# Altium PCB Master.PcbDoc
Units mm, origin at the board's own origin, x right, y up, seen from the top; angles counter-clockwise.
Board outline 61 x 45.7 mm, 2 copper layers (Top Layer, Bottom Layer); 57 components, 33 nets, 169 pads, 66 vias.
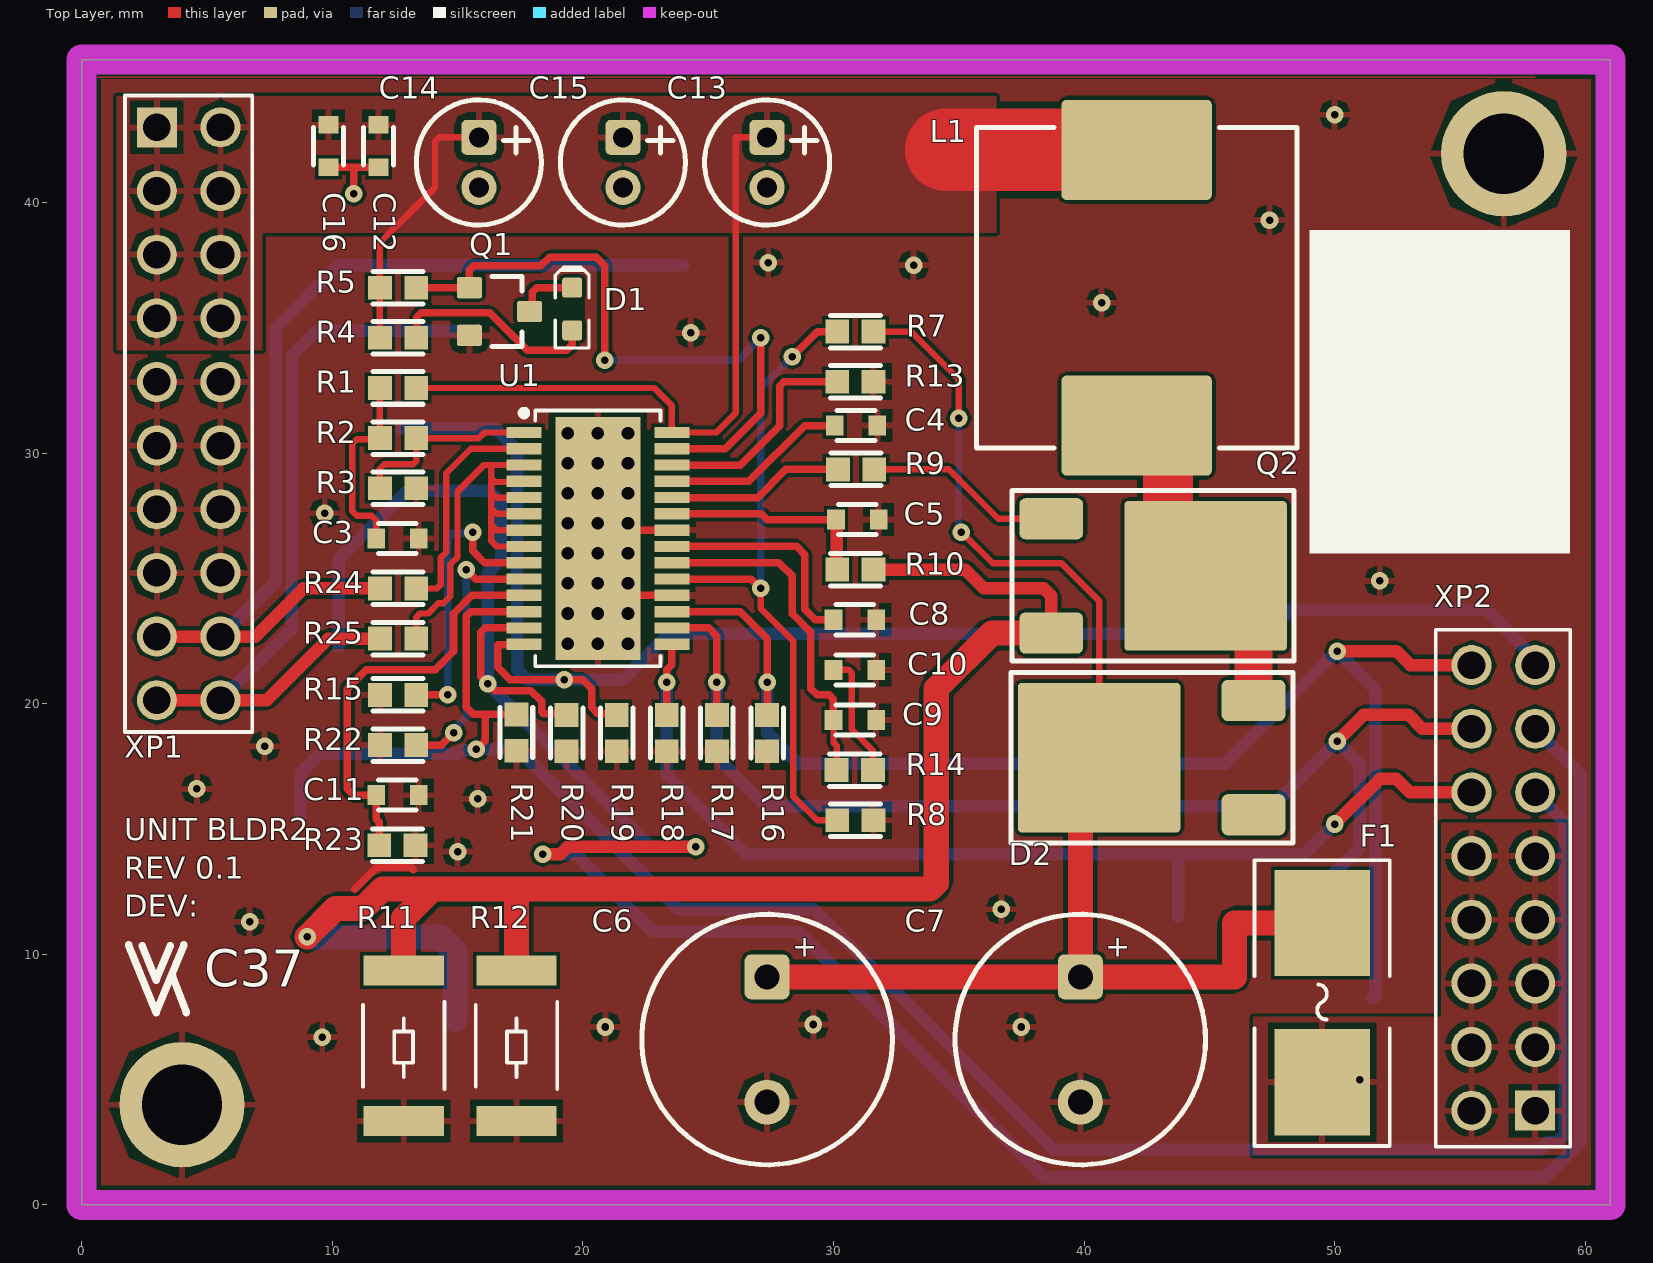
[diagram p0: Top Layer view]
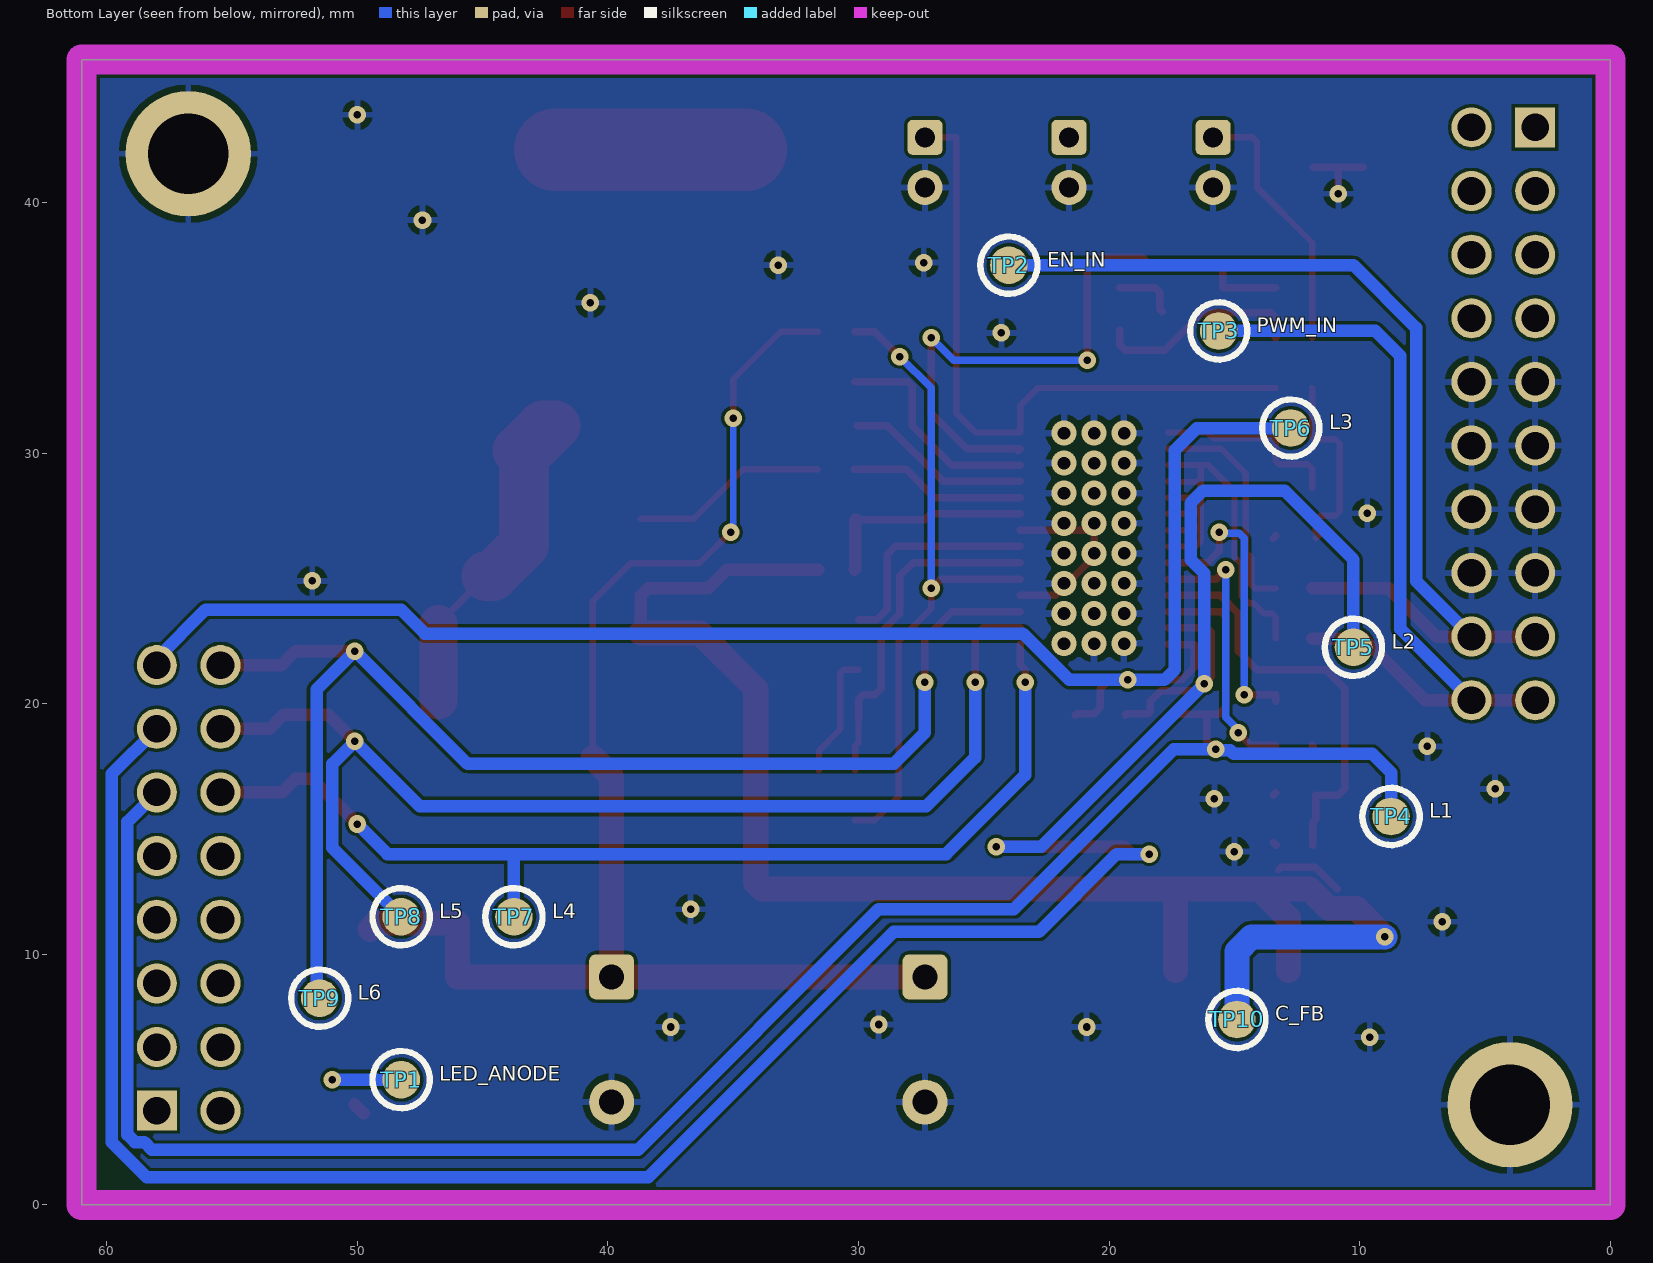
[diagram p1: Bottom Layer view, seen from below]

## Layer stack, top to bottom
Top Solder: solder mask 0.0102, Solder Resist, Dk 3.5
Top Layer: signal copper 0.0356
Dielectric 1: dielectric 0.32, FR-4, Dk 4.8
Bottom Layer: signal copper 0.0356
Bottom Solder: solder mask 0.0102, Solder Resist, Dk 3.5

## Board outline
0,0 0,45.7 61,45.7 61,0

## Design rules (kind name [scope] priority, off if disabled: settings)
Clearance [All] p1: gap=0.127 ignorepadtopadclearanceinfootprint=FALSE
PolygonConnect [All] p1: connectstyle=Relief reliefconductorwidth=0.254 reliefentries=4 polygonreliefangle="90 Angle" airgapwidth=0.254
RoutingVias [All] p1: holewidth=0.711 width=1.27 viastyle="Through Hole" minholewidth=0.711 minwidth=1.27 maxholewidth=0.711 maxwidth=1.27
SolderMaskExpansion [All] p1: expansion=0.102
Width [All] p1: maxlimit=12 minlimit=0.254 preferedwidth=0.254
30 further rules are at their usual default settings.

## Components (designator, comment, footprint, x,y, rotation, side; value= is the part's Value field where it differs from the comment)
C3 "0603-X7R-50-0.01 мкф" CAP_0603 12.6,26.6 r0 top
C4 "0603-X5R-10 1 мкф" CAP_0603 30.9,31.1 r0 top
C5 "0603-NP0-50-390 пф J" CAP_0603 30.95,27.35 r0 top
C6 "ECAP 47uF 100V 10x12.5" "CAP_ECR 10X12.5" 27.35,6.6 r270 top
C7 "ECAP 47uF 100V 10x12.5" "CAP_ECR 10X12.5" 39.85,6.6 r270 top
C8 "0603-X7R-10 2.2 мкф" CAP_0603 30.85,23.35 r0 top
C9 "0603-NP0-50-33 пф J" CAP_0603 30.85,19.35 r0 top
C10 "0603-X7R-50-0.033 мкф" CAP_0603 30.85,21.35 r0 top
C11 "0603-X7R-50-0.1 мкф" CAP_0603 12.6,16.35 r0 top
C12 "0603-X7R-10 2.2 мкф" CAP_0603 11.85,42.25 r270 top
C13 "ESX 50 в-10 мкф 5x11 Hitano" "CAP_ECR 5X11" 27.35,42.6 r270 top
C14 "ECAP (К50-35), 100мкФ, 35В, 105°C, 20%, 6.3x12мм P:2.5мм" "CAP_ECR 5X11" 15.85,42.6 r270 top
C15 "ECAP (К50-35), 100мкФ, 35В, 105°C, 20%, 6.3x12мм P:2.5мм" "CAP_ECR 5X11" 21.6,42.6 r270 top
C16 "0603-X7R-50-0.1 мкф" CAP_0603 9.85,42.25 r270 top
D1 "KPT-1608SURCK, KingBright" LED_0603_RED 19.575,35.75 r90 top value=KPT-1608SURCK
D2 "STPS5H100B" D-PAK 48.03,17.85 r90 top
F1 "2A" FUSE_LITTEL_0154 49.5,8.25 r270 top
L1 "47uH" INDUCTOR_B82477G 42.1,36.6 r270 top
Q1 "MMUN2214LT1G" SOT_23 16.675,35.65 r270 top
Q2 "FDD86102LZ" D-PAK 37.42,25.1 r270 top
R1 "0603-100к J" resistor_0603 12.625,32.6 r0 top value=100k
R2 "0603-100к J" resistor_0603 12.625,30.6 r180 top value=100k
R3 "0603-30к F" resistor_0603 12.625,28.6 r180 top value=30k
R4 "0603-7.5 к F" resistor_0603 12.625,34.6 r180 top value=7.5k
R5 "0603-30к F" resistor_0603 12.625,36.6 r180 top value=30k
R7 "0603-169 к F" resistor_0603 30.875,34.85 r0 top value=169k
R8 "0603-7.5 к F" resistor_0603 30.875,15.35 r180 top value=7.5k
R9 "0603-3 F" resistor_0603 30.9,29.35 r0 top value=3
R10 "0603-200 F" resistor_0603 30.875,25.35 r0 top value=200
R11 "2512-0.1 F" resistor_2512 12.85,6.35 r90 top value=0.1
R12 "2512-0.1 F" resistor_2512 17.35,6.35 r90 top value=0.1
R13 "0603-82 к J" resistor_0603 30.875,32.85 r0 top value=82k
R14 "0603-330 J" resistor_0603 30.85,17.35 r180 top value=330k
R15 "0603-560 к F" resistor_0603 12.625,20.35 r0 top value=560k
R16 "0603-10к J" resistor_0603 27.35,18.825 r90 top value=10k
R17 "0603-10к J" resistor_0603 25.35,18.825 r90 top value=10k
R18 "0603-10к J" resistor_0603 23.35,18.825 r90 top value=10k
R19 "0603-10к J" resistor_0603 21.35,18.825 r90 top value=10k
R20 "0603-10к J" resistor_0603 19.35,18.825 r90 top value=10k
R21 "0603-10к J" resistor_0603 17.35,18.85 r90 top value=10k
R22 "0603-82 к J" resistor_0603 12.625,18.35 r0 top value=82k
R23 "0603-69.8 к F" resistor_0603 12.6,14.35 r180 top value=69.8k
R24 "0603-3 F" resistor_0603 12.625,24.6 r0 top value=3
R25 "0603-3 F" resistor_0603 12.625,22.6 r0 top value=3
TP1 "LED_ANODE" OTHER_SMD_TP_1.5MM#1 48.25,5 r180 bottom
TP2 "EN_IN" OTHER_SMD_TP_1.5MM#1 24,37.5 r180 bottom
TP3 "PWM_IN" OTHER_SMD_TP_1.5MM#1 15.625,34.875 r180 bottom
TP4 "L1" OTHER_SMD_TP_1.5MM#1 8.75,15.5 r180 bottom
TP5 "L2" OTHER_SMD_TP_1.5MM#2 10.25,22.25 r180 top
TP6 "L3" OTHER_SMD_TP_1.5MM#1 12.75,31 r180 bottom
TP7 "L4" OTHER_SMD_TP_1.5MM#1 43.75,11.5 r180 bottom
TP8 "L5" OTHER_SMD_TP_1.5MM#1 48.25,11.5 r180 bottom
TP9 "L6" OTHER_SMD_TP_1.5MM#1 51.5,8.25 r180 bottom
TP10 "C_FB" OTHER_SMD_TP_1.5MM#1 14.9,7.4 r180 bottom
U1 "TPS61196PWPT(R)" HTSSOP_28 20.6,26.6 r0 top
XP1 "PBD-20" CONN_PBD-20 4.27,31.57 r270 top
XP2 "PBD-16" CONN_PBD-16 56.73,12.65 r90 top

## Footprints (in the part's own frame and the unit in brackets; to place one, negate y for a bottom-side part, rotate by r counter-clockwise, add the part's x,y. Pads: shape width x height; smd on the part's side, far side on the other; paste and mask are expansions set on the pad)
CAP_0603 [mm] "Chip Capacitor, 2-Leads, Body 1,60x0,80mm, IPC Medium Density"
  rect 0.7x0.8 smd: 1(-0.85,0) 2(0.85,0)
  silkscreen extent -0.75,-0.6 0.75,0.6, body extent -0.8,-0.41 0.8,0.41, height 0.92
"CAP_ECR 5X11" [mm]
  rrect30% 1.4x1.4 hole 0.8: 1(0,0)
  round 1.4 hole 0.8: 2(2,0)
  silkscreen extent -1.5,-2.5 3.5,2.5, body extent -1.51,-2.54 3.54,2.51, height 11.53
"CAP_ECR 10X12.5" [mm]
  rrect30% 1.8x1.8 hole 1: 1(-2.5,0)
  round 1.8 hole 1: 2(2.5,0)
  silkscreen extent -5,-5 5,5, body extent -5.03,-5.03 5.03,5.03, height 13.03
CONN_PBD-16 [mm]
  rect 1.6x1.6 hole 1.1: 1(-8.89,-1.27)
  round 1.6 hole 1.1: 2(-8.89,1.27) 3(-6.35,-1.27) 4(-6.35,1.27) 5(-3.81,-1.27) 6(-3.81,1.27) 7(-1.27,-1.27) 8(-1.27,1.27) 9(1.27,-1.27) 10(1.27,1.27) 11(3.81,-1.27) 12(3.81,1.27) 13(6.35,-1.27) 14(6.35,1.27) 15(8.89,-1.27) 16(8.89,1.27)
  silkscreen extent -10.33,-2.68 10.3,2.7, body extent -10.16,-2.54 10.17,2.45, height 8.5
CONN_PBD-20 [mm]
  rect 1.6x1.6 hole 1.1: 1(-11.43,-1.27)
  round 1.6 hole 1.1: 2(-11.43,1.27) 3(-8.89,-1.27) 4(-8.89,1.27) 5(-6.35,-1.27) 6(-6.35,1.27) 7(-3.81,-1.27) 8(-3.81,1.27) 9(-1.27,-1.27) 10(-1.27,1.27) 11(1.27,-1.27) 12(1.27,1.27) 13(3.81,-1.27) 14(3.81,1.27) 15(6.35,-1.27) 16(6.35,1.27) 17(8.89,-1.27) 18(8.89,1.27) 19(11.43,-1.27) 20(11.43,1.27)
  silkscreen extent -12.7,-2.54 12.7,2.54, body extent -12.7,-2.54 12.7,2.54, height 8.5
D-PAK [mm]
  rrect30% 1.65x2.54 smd: 1(-2.28,1.27) 2(2.28,1.27)
  rrect5% 5.97x6.48 smd: 3(0,7.43)
  silkscreen extent -3.4,-0.3 3.4,10.95, body extent -3.29,0.5 3.29,10.2, height 2.3
FUSE_LITTEL_0154 [mm]
  rect 4.24x3.81 smd: 1(-3,0) 2(3.35,0)
  silkscreen extent -5.5,-2.7 5.9,2.7, body extent -4.65,-2.5 5.05,2.5, height 3.64
HTSSOP_28 [mm] "HTSSOP-28, 28-Leads, Body 9,70x4,40mm, Pitch 0,65mm, Thermal Pad 9,70x3,40mm, IPC Medium Density"
  rect 1.4x0.45 smd: 1(-2.95,4.225) 2(-2.95,3.575) 3(-2.95,2.925) 4(-2.95,2.275) 5(-2.95,1.625) 6(-2.95,0.975) 7(-2.95,0.325) 8(-2.95,-0.325) 9(-2.95,-0.975) 10(-2.95,-1.625) 11(-2.95,-2.275) 12(-2.95,-2.925) 13(-2.95,-3.575) 14(-2.95,-4.225) 15(2.95,-4.225) 16(2.95,-3.575) 17(2.95,-2.925) 18(2.95,-2.275) 19(2.95,-1.625) 20(2.95,-0.975) 21(2.95,-0.325) 22(2.95,0.325) 23(2.95,0.975) 24(2.95,1.625) 25(2.95,2.275) 26(2.95,2.925) 27(2.95,3.575) 28(2.95,4.225)
  rect 3.4x9.7 smd mask+0: 29(0,0)
  silkscreen extent -3.07,-5.1 2.5,5.12, body extent -3.2,-4.9 3.2,4.9, height 1.2
INDUCTOR_B82477G [mm]
  rrect10% 4x6 smd: 1(-5.5,0) 2(5.5,0)
  silkscreen extent -6.4,-6.4 6.4,6.4, body extent -6.25,-6.25 6.25,6.25, height 7.5
LED_0603_RED [mm]
  round 0.254 on Mech15: 0(0,0)
  rrect25% 0.8x0.8 smd: 1(-0.85,0) 2(0.85,0)
  Top Layer pour cut-out: -0.5,0.5 0.5,0.5 0.5,-0.5 -0.5,-0.5
  silkscreen extent -1.55,-0.67 1.68,0.67, body extent -0.8,-0.4 0.8,0.4, height 0.75
OTHER_SMD_TP_1.5MM#1 [mm] "Test point"
  round 1.5 smd: 1(0,0)
  silkscreen extent -1.14,-1.14 1.14,1.14
OTHER_SMD_TP_1.5MM#2 [mm] "Test point"
  round 1.5 smd far side: 1(0,0)
resistor_0603 [mm] "Chip Capacitor, 2-Leads, Body 1,60x0,80mm, IPC Medium Density"
  rect 0.95x0.95 smd: 1(-0.725,0) 2(0.725,0)
  silkscreen extent -1,-0.65 1,0.65, body extent -0.8,-0.4 0.8,0.4, height 0.5
resistor_2512 [mm] "Chip Resistor, 2-Leads, Body 6,3x3,2mm, IPC Low Density"
  rect 1.2x3.2 smd: 1(-3,0) 2(3,0)
  silkscreen extent -1.73,-1.63 1.75,1.63, body extent -3.2,-1.6 3.2,1.6, height 0.55
SOT_23 [mm] "SOT-23; 3 Leads; Body 3.0 x 2.5 mm, inc. leads (LxW max)"
  rrect20% 0.85x1 smd: 1(-0.95,-1.2) 2(0.95,-1.2) 3(0,1.2)
  silkscreen extent -1.4,-0.3 1.4,0.9, body extent -1.5,-1.5 1.5,1.5, height 1.3

## Part data
C3 C5 C9 C10 C11 C16: "Конденсатор Чип Керамический", Voltage=50V, Foot=0603
  C3: Cap=0.01u
  C5: Cap=390p
  C9: Cap=33p
  C10: Cap=0.033u
  C11 C16: Cap=0.1u, Price, $=0.1
C4 C8 C12: "Конденсатор Чип Керамический", Voltage=10V, Foot=0603
  C4: Cap=1u
  C8 C12: Cap=2.2u
C6 C7: Voltage=100V, Analog="EXR 16 в-3300 мкф 16x26", Cap=47u
C13: "Конденсатор Алюминиевый Низкоимпедансный", Voltage=50V, Analog="EXR 50 в-10 мкф 5x11 Hitano", Cap=10u
C14 C15: library part "ECAP 50V 100uF 6.3x12", "Конденсатор электролитический алюминиевый", Voltage=50V, Cap=100u
D1: library part LED_0603_KPT-1608SURCK_red_120mcd, Analog=150060RS75000, HelpURL="L:\Dev\Техническая документация\Светодиоды\Kingbright\SMD\KPT-1608SURCK(0603).pdf"
D2: library part Schottky_STPS5H100B, "DIODE SCHOTTKY 5A 100V"
F1: library part "FUSE_LITTEL 0154", "Плавкий предохранитель LITTELFUSE 0154"
L1: library part INDUCTOR_B82477G4473M, "47 мкГн, 2.5 А, 12.8х12.8, Катушка индуктивности SMD"
Q1: library part "BEC_MMUN2214LT1G_50V 0.1A 0.25W", "NPN Digital Transistor", PackageDocument=May-1999, DatasheetDocument=Jun-1999, PackageReference=SOT23, Published=17-Sep-2003, Publisher="Altium Limited"
Q2: library part MOSFET_FDD86102LZ, "MOSFET N-CHANNEL 100V 8A", URL=https://www.chipdip.ru/product/fdd86102lz-mosfet-n-channel-100v-8a
R1 R2: library part "0603-100 к J", "Резистор Чип", Power=0.1W, Foot=0603, Price, $=0.015
R3 R5: library part "0603-30 к F", "Резистор Чип", Power=0.1W, Tolerance=1%, Foot=0603
R4 R7 R8 R9 R10 R15 R23 R24 R25: "Резистор Чип", Power=0.1W, Tolerance=1%, Foot=0603
R11 R12: "Резистор Чип", Power=1W, Foot=2512
R13 R14 R22: "Резистор Чип", Power=0.1W, Foot=0603
  R14: Price, $=0.015
R16 R17 R18 R19 R20 R21: library part "0603-10 к J", "Резистор Чип", Power=0.1W, Foot=0603, Price, $=0.015
TP1 TP2 TP3 TP4 TP5 TP6 TP7 TP8 TP9 TP10: library part "Test Point_1.5MM"
U1: library part "LED DRV_TPS61196"
XP1: library part CONN_PBD-20, "Header, 10-Pin, Dual row", LatestRevisionDate=17-Jul-2002, LatestRevisionNote="Re-released for DXP Platform.", Publisher="Altium Limited"
XP2: library part CONN_PBD-16, "Header, 8-Pin, Dual row", LatestRevisionDate=17-Jul-2002, LatestRevisionNote="Re-released for DXP Platform.", Publisher="Altium Limited"

## Free pads (board coordinates)
  round 5 hole 3.2: 2(56.746,41.946) 3(4,4)

## Via types
v1: diameter 0.7, hole 0.3, Top Layer to Bottom Layer, 42 vias
v2: diameter 1, hole 0.5, Top Layer to Bottom Layer, tented both sides, 24 vias

## Nets (pads, with @x,y where several pads share a name; then routed paths per layer and width w, separated by ;. In a path a pad name is that pad's centre, name@x,y a point inside that pad or via, vN(x,y) a via of type N, cw(c..) or ccw(c..) an arc to the next point about the centre after c; other vN are vias at no path point)
+12: C12.1 C13.1 C14.1 C15.1 C16.1 L1.1 R1.2 R4.2 R5.2 U1.28 XP1.1 XP1.2 XP1.3 XP1.4 XP1.5 XP1.6 XP1.7 XP1.8 | length 44.8
  Top Layer w0.254: R4.2 R5.2 11.9,38.4 14.1,40.6 14.1,42.424 14.276,42.6 C14.1 ; R1.2 22.85,32.6 23.55,31.9 U1.28 25.325,30.825 26.1,31.6 26.1,42.6 C13.1
  Top Layer w3.3: 34.5,42.1 L1.1
COMP: C9.1 R14.2 U1.20 | length 13.8
  Top Layer w0.254: C9.1 30,18.45 30.125,18.325 R14.2
  Top Layer w0.3: U1.20 27.825,25.625 28.35,25.1 28.35,23.6 29.1,22.85 29.1,20.6 29.35,20.35 29.825,20.35 30,20.174 C9.1
"ENABLE IN": R24.1 TP2.1 XP1.17 XP1.18 | length 40.2
  Top Layer w0.5: XP1.17 XP1.18 6.93,22.68 8.85,24.6 R24.1
  Bottom Layer w0.5: XP1.18 7.75,24.89 7.75,35 10.25,37.5 TP2.1
FSW: R13.1 U1.26 | length 8.9
  Top Layer w0.3: U1.26 26.275,29.525 27.85,31.1 27.85,32.674 28.026,32.85 R13.1
GND: C3.2 C4.2 C5.2 C6.2 C7.2 C8.2 C9.2 C10.2 C11.2 C12.2 C13.2 C14.2 C15.2 C16.2 pad.2 pad.3 Q1.2 R3.1 R8.1 R11.1 R12.1 R13.2 R15.1 R16.1 R17.1 R18.1 R19.1 R20.1 R21.1 R22.1 R23.1 U1.18 U1.22 U1.29 XP1.9 XP1.10 XP1.11 XP1.12 XP1.13 XP1.14 XP1.15 XP1.16 | length 13.3
  Top Layer w0.3: C16.2 10.85,41.4 ; v1(10.85,40.35) 10.85,41.4 ; 10.9,12.6 11.777,13.477 13.123,13.477 13.223,13.377 ; R22.1@11.85,18.3 R22.1 ; C12.2 10.85,41.4 ; R23.1 R23.1@13.45,14.475 ; C11.2@13.35,16.45 C11.2 ; C3.2@13.35,26.7 C3.2 ; R21.1 R21.1@17.375,18.1 ; U1.29 v2(20.6,26) 20.6,25.875 22.15,24.325 U1.18 ; U1.29@20.925,26.925 U1.22
  other v1: 9.6,6.7 20.9,7.1 37.5,7.1 29.2,7.2 6.7,11.3 36.7,11.8 15,14.1 15.8,16.2 4.6,16.6 7.3,18.3 51.8,24.9 9.7,27.6 24.3,34.8 40.7,36 33.2,37.5 27.4,37.6 47.4,39.3 50,43.5
  other v2: 19.4,22.4 20.6,22.4 21.8,22.4 19.4,23.6 20.6,23.6 21.8,23.6 19.4,24.8 20.6,24.8 21.8,24.8 19.4,26 21.8,26 19.4,27.2 20.6,27.2 21.8,27.2 19.4,28.4 20.6,28.4 21.8,28.4 19.4,29.6 20.6,29.6 21.8,29.6 19.4,30.8 20.6,30.8 21.8,30.8
L1: R21.2 TP4.1 U1.12 XP2.11 | length 83.3
  Top Layer w0.3: v1(15.75,18.175) 16.1,18.525 16.1,19.575 ; R21.2 16.1,19.575 ; U1.12 15.526,23.675 15.35,23.499 15.35,19.85 15.625,19.575 16.1,19.575
  Bottom Layer w0.5: TP4.1 8.75,17.25 9.5,18 15.029,18 15.165,18.137 15.712,18.137 v1(15.75,18.175) 17.425,18.175 23.8,11.8 29.2,11.8 38.8,2.2 58.2,2.2 58.502,2.502 58.875,2.502 59.177,2.804 59.177,15.283 XP2.11
L2: R20.2 TP5.1 U1.13 XP2.13 | length 108.4
  Top Layer w0.3: U1.13 16.101,23.025 15.925,22.849 15.925,21.075 16.475,20.526 17.925,20.526 18.35,20.1 18.35,19.675 18.425,19.6 19.3,19.6 R20.2
  Top Layer w0.5: v1(18.4,14) 19.1,14 19.4,14.3 v1(24.5,14.3)
  Bottom Layer w0.5: TP5.1 10.25,25.75 13,28.5 16.25,28.5 16.75,28 16.75,25.75 16.2,25.2 v1(16.2,20.8) 22.7,14.3 v1(24.5,14.3) ; v1(18.4,14) 19.7,14 22.8,10.9 28.6,10.9 38.4,1.1 58.4,1.1 59.804,2.504 59.804,17.196 XP2.13
L3: R19.2 TP6.1 U1.14 XP2.15 | length 64.7
  Top Layer w0.3: U1.14 17.625,22.35 16.6,22.35 16.6,21.45 17.097,20.953 19.998,20.953 20.35,20.6 20.35,19.85 20.6,19.6 21.3,19.6 R19.2
  Bottom Layer w0.5: TP6.1 16.5,31 17.377,30.123 17.377,21.373 17.8,20.95 v1(19.25,20.95) 21.591,20.95 23.441,22.8 47.3,22.8 48.25,23.75 56.05,23.75 58,21.8 XP2.15
L4: R18.2 TP7.1 U1.15 XP2.12 | length 44
  Top Layer w0.3: R18.2 v1(23.35,20.85) 23.35,21.35 23.55,21.55 U1.15
  Top Layer w0.5: v1(50,15.2) 51.8,17 52.46,17 53,16.46 XP2.12
  Bottom Layer w0.5: v1(23.35,20.85) 23.35,17.15 26.5,14 43.75,14 ; TP7.1 43.75,14 ; v1(50,15.2) 48.8,14 43.75,14
L5: R17.2 TP8.1 U1.16 XP2.14 | length 49.3
  Top Layer w0.3: U1.16 25.027,23.025 25.35,22.701 v1(25.35,20.85) R17.2
  Top Layer w0.5: v1(50.1,18.5) 51.16,19.56 52.94,19.56 53.5,19 XP2.14
  Bottom Layer w0.5: v1(25.35,20.85) 25.35,17.85 27.3,15.9 47.5,15.9 v1(50.1,18.5) 51,17.6 51,14.25 TP8.1
L6: R16.2 TP9.1 U1.17 XP2.16 | length 54.6
  Top Layer w0.3: U1.17 26.275,23.675 27.35,22.6 v1(27.35,20.85) R16.2
  Top Layer w0.5: v1(50.1,22.1) 52.46,22.1 53.02,21.54 55.44,21.54 XP2.16@55.46,21.56
  Bottom Layer w0.5: v1(27.35,20.85) 27.35,18.85 28.6,17.6 45.6,17.6 v1(50.1,22.1) 51.627,20.573 51.627,8.377 TP9.1
"LED P": F1.2 TP1.1 XP2.1 XP2.2 XP2.3 XP2.4 XP2.5 XP2.6 XP2.7 XP2.8 XP2.9 XP2.10 | length 3.3
  Top Layer w0.5: F1.2@49.75,3.65 F1.2@50.11,4.01
  Bottom Layer w0.5: TP1.1 v1(51,5)
NetC3_1: C3.1 R1.1 R2.2 | length 7.9
  Top Layer w0.254: C3.1 11.6,26.75 11.65,26.75 11.75,26.85 11.75,27.324 11.575,27.5 10.976,27.5 10.8,27.676 10.8,30.375 10.976,30.551 11.851,30.551 R2.2 R1.1
NetC4_1: C4.1 U1.25 | length 7.4
  Top Layer w0.3: U1.25 26.625,28.875 28.85,31.1 C4.1
NetC5_1: C5.1 R10.1 U1.23 | length 8.7
  Top Layer w0.3: U1.23 27.125,27.575 27.35,27.35 C5.1
  Top Layer w0.5: C5.1 30.125,27.325 30.125,25.375 R10.1
NetC6_1: C6.1 C7.1 D2.3 F1.1 R7.2 | length 56.7
  Top Layer w0.254: R7.2 33.1,34.85 35,32.95 v1(35,31.4) ; v1(35.1,26.85) 36.35,25.6 39.1,25.6 40.6,24.1 D2.3
  Top Layer w1: C6.1 C7.1 ; D2.3 39.85,17.1 C7.1 ; F1.1@49.5,11 49.25,11.25 46,11.25 46,9.1 C7.1
  Bottom Layer w0.254: v1(35,31.4) 35,26.95 v1(35.1,26.85)
NetC10_1: C10.1 R14.1 | length 5
  Top Layer w0.254: C10.1 30.6,21.35 30.725,21.225 30.725,18.975 31.575,18.125 R14.1
NetC11_1: C11.1 R23.2 U1.11 | length 16.6
  Top Layer w0.3: C11.1@11.6,16.35 10.85,16.35 10.6,16.6 10.6,20.6 11.35,21.35 14.1,21.35 14.838,22.087 14.838,23.591 15.572,24.325 U1.11 ; C11.1 11.75,15.4 11.875,15.275 R23.2
NetD1_1: D1.1 R4.1 | length 8.5
  Top Layer w0.3: R4.1 13.375,34.625 13.275,34.725 13.375,34.825 13.375,35.424 13.551,35.6 16.275,35.6 17.775,34.1 19.35,34.1 19.575,34.325 D1.1
NetD1_2: D1.2 Q1.3 | length 2.5
  Top Layer w0.3: Q1.3 17.975,35.75 17.975,36.424 18.151,36.6 D1.2
NetD2_2: D2.2 L1.2 Q2.3 | length 14.8
  Top Layer w0.3: Q2.3 Q2.3@46.76,23.19
  Top Layer w1.5: D2.2 Q2.3@46.76,23.19
  Top Layer w2: L1.2@42.85,30.35 L1.2 42.6,31.1 43.6,30.1 43.35,30.1 43.35,26.345 44.595,25.1 Q2.3
NetQ1_1: Q1.1 R5.1 U1.27 | length 26.2
  Top Layer w0.3: R5.1 Q1.1 15.475,37.299 15.651,37.475 18.325,37.475 18.675,37.825 20.525,37.825 20.875,37.475 v1(20.875,33.7) ; U1.27@23.625,30.1 U1.27 25.675,30.175 27.1,31.6 v1(27.1,34.6)
  Bottom Layer w0.3: v1(20.875,33.7) 26.2,33.7 v1(27.1,34.6)
NetQ2_1: Q2.1 R9.2 | length 7.9
  Top Layer w0.254: R9.2 34.6,29.35 36.57,27.38 Q2.1
NetQ2_2: Q2.2 R10.2 R11.2 R12.2 TP10.1 | length 64.2
  Top Layer w0.5: R10.2 35.25,25.35 36,24.6 38.397,24.6 38.69,24.307 Q2.2
  Top Layer w1: v1(9,10.7) 10.123,11.823 11.222,11.823 11.999,12.6 14,12.6 ; R11.2 12.85,11.45 14,12.6 ; R12.2 17.35,12.451 17.499,12.6 ; Q2.2 36.32,22.82 34.1,20.6 34.1,12.85 33.85,12.6 17.499,12.6 ; 14,12.6 17.499,12.6
  Bottom Layer w1: v1(9,10.7) 14.314,10.7 14.9,10.114 TP10.1
NetR2_1: R2.1 R3.2 U1.1 | length 7.7
  Top Layer w0.254: R3.2 11.9,29.374 12.076,29.55 13.225,29.55 13.35,29.675 R2.1 15.85,30.6 16.075,30.825 U1.1
NetR7_1: R7.1 R8.2 U1.19 | length 26.7
  Top Layer w0.254: v1(27.1,24.6) 27.1,23.8 28.4,22.5 28.4,16.3 29.35,15.35 R8.2
  Top Layer w0.3: U1.19 26.725,24.975 v1(27.1,24.6) ; v1(28.35,33.85) 29.35,34.85 R7.1
  Bottom Layer w0.3: v1(27.1,24.6) 27.1,32.6 v1(28.35,33.85)
NetR9_1: R9.1 U1.24 | length 7.1
  Top Layer w0.3: U1.24 26.975,28.225 28.1,29.35 R9.1
NetR15_2: R15.2 U1.9 | length 11.9
  Top Layer w0.3: R15.2@13.35,20.1 R15.2 v1(14.6,20.35) ; v1(15.6,26.85) 15.6,26.1 16.075,25.625 U1.9
  Bottom Layer w0.3: v1(14.6,20.35) 14.6,26.6 14.8,26.8 15.55,26.8 v1(15.6,26.85)
NetR22_2: R22.2 U1.10 | length 10.9
  Top Layer w0.3: R22.2 14.35,18.35 v1(14.85,18.85) ; v1(15.35,25.35) 15.725,24.975 U1.10
  Bottom Layer w0.3: v1(14.85,18.85) 14.85,18.958 15.35,19.458 v1(15.35,25.35)
NetR24_2: R24.2 U1.2 | length 9.1
  Top Layer w0.254: R24.2 14.173,24.6 14.322,24.749 14.322,25.821 14.543,26.043 14.543,29.193 15.525,30.175 U1.2
NetR25_2: R25.2 U1.3 U1.4 U1.5 U1.6 U1.7 U1.8 | length 19.9
  Top Layer w0.254: R25.2 13.35,23.451 13.499,23.6 13.825,23.6 14.23,24.005 14.434,24.005 14.711,24.282 14.711,25.565 14.996,25.85 14.996,28.467 16.054,29.525 16.287,29.525 ; U1.8 16.569,26.275 16.35,26.494 16.35,27.144 ; U1.7 16.569,26.925 16.35,27.144 ; U1.6 16.569,27.575 16.35,27.794 ; U1.5 16.569,28.225 16.35,28.444 ; U1.4 17.625,28.85 16.499,28.85 16.35,28.999 ; U1.3 16.287,29.525 ; 16.287,29.525 16.35,29.462 16.35,28.999 ; 16.35,27.144 16.35,27.794 ; 16.35,27.794 16.35,28.444 ; 16.35,28.444 16.35,28.999
"PWM IN": R25.1 TP3.1 XP1.19 XP1.20 | length 32.5
  Top Layer w0.5: XP1.19 XP1.20 7.39,20.14 9.85,22.6 R25.1
  Bottom Layer w0.5: XP1.20 8.377,22.977 8.377,33.877 9.375,34.875 TP3.1
REF: C8.1 U1.21 | length 8.9
  Top Layer w0.3: U1.21 28.527,26.275 28.85,25.951 28.85,23.776 29.276,23.35 C8.1
pads on no net: D1.0 D2.1

## Polygon pours and split planes (outlines as drawn)
no net on Top Layer "Top Layer-No Net" (solid, pour order 78): 2.5,-5.75
GND on Top Layer "Top Layer-GND" (solid, remove dead copper, pour order 76): 0.5,45.25 60.5,45.25 60.5,0.5 0.5,0.5
no net on Top Layer "Top Layer-No Net 1" (solid, pour order 74): 0.1,45.6
+12 on Top Layer "Top Layer-+12" (solid, remove dead copper, pour order 72): 1.4,34.1 1.4,44.25 36.5,44.25 36.5,38.8 7.2,38.8 7.2,34.1
"LED P" on Top Layer "Top Layer-LED P" (solid, pour order 64): 59.25,15.25 59.25,2 46.75,2 46.75,7.5 54.25,7.5 54.25,15.25
no net on Top Layer "Top Layer-No Net 2" (solid, pour order 60): 1,44.6
no net on Top Layer "Top Layer-No Net 3" (solid, pour order 54): 0.65,45 58,45
no net on Top Layer "Top Layer-No Net 4" (solid, pour order 52): 0.65,45
no net on Top Layer "Top Layer-No Net 5" (solid, pour order 32): 3.1,44.6
no net on Top Layer "Top Layer-No Net 6" (solid, pour order 20): 9.475,85.85
no net on Top Layer "Top Layer-No Net 7" (solid, pour order 18): 15.1,85.85
no net on Top Layer "Top Layer-No Net 8" (solid, pour order 14): 3.85,91.35
no net on Top Layer "Top Layer-No Net 9" (solid, pour order 8): 2.6,85.1
no net on Top Layer "Top Layer-No Net 10" (solid, pour order 0): 7.1,89.6
GND on Bottom Layer "Bottom Layer-GND" (solid, pour order 80): 0.5,45.25 60.5,45.25 60.5,0.5 0.5,0.5
no net on Bottom Layer "Bottom Layer-No Net" (solid, pour order 66): 1,44.6
no net on Bottom Layer "Bottom Layer-No Net 1" (solid, pour order 46): 3.1,44.6

## Keep-outs
Keep-Out Layer:
  the board outline again, w1.2

## Silkscreen, mask and mechanical layers (free items; w line width, h text height)
Top Overlay:
  rectangle: 49,26 59.4,38.9
  lines w0.3: 1.875,10.375 2.975,7.675 4.075,10.375 ; 2.415,10.351 2.976,8.975 3.536,10.351 ; 3.625,9.125 4.175,7.675
  text "UNIT BLDR2 / REV 0.1 / DEV:" at 1.7,11.2 h1.52
  text "С37" at 4.9,8.2 h2.52
Board Contour:
  the board outline again, w0.2

## Dimensions
0,0 to 0,45.7 on Mechanical 16
0,45.7 to 61,45.7 on Mechanical 16

## Text inside footprints (layer, text, board x,y; h text height)
C6: Top Overlay "+" at 28.35,9.6 h1.5; Mechanical 8 "+" at 26.35,11.2 h2 r270
C7: Top Overlay "+" at 40.85,9.6 h1.5; Mechanical 8 "+" at 38.85,11.2 h2 r270
C13: Mechanical 8 "+" at 26.75,43.8 h1.2 r270
C14: Mechanical 8 "+" at 15.25,43.8 h1.2 r270
C15: Mechanical 8 "+" at 21,43.8 h1.2 r270